# EAGLE board saturn_frontend_rv3 (EAGLE 7.7.0)
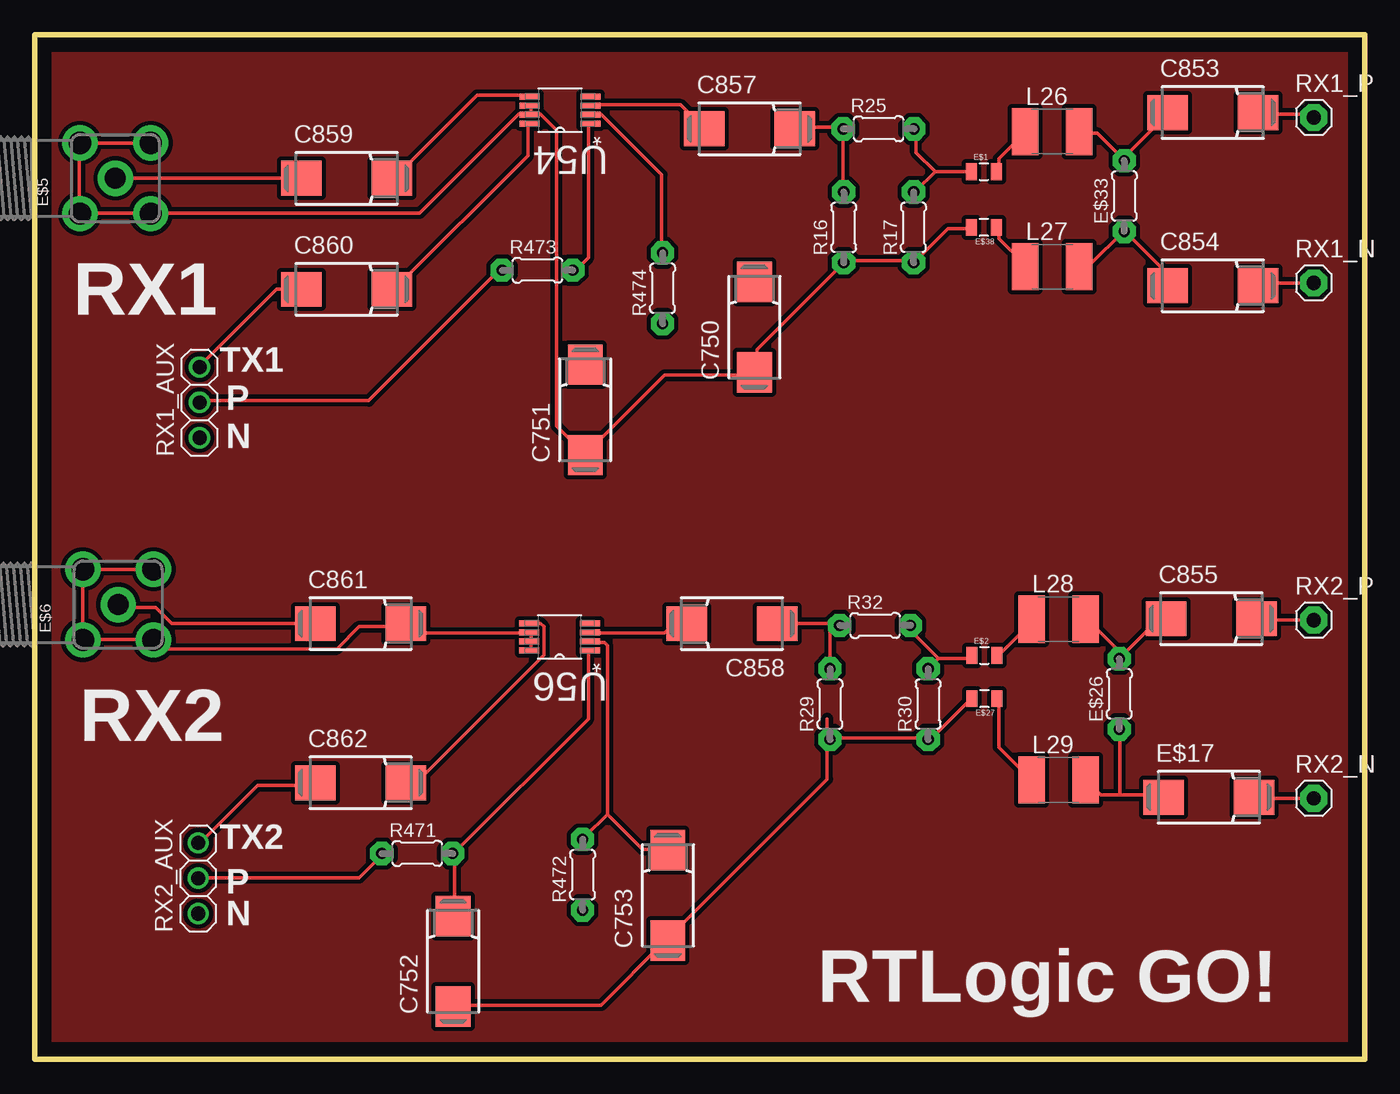
[diagram p0: board, top side]
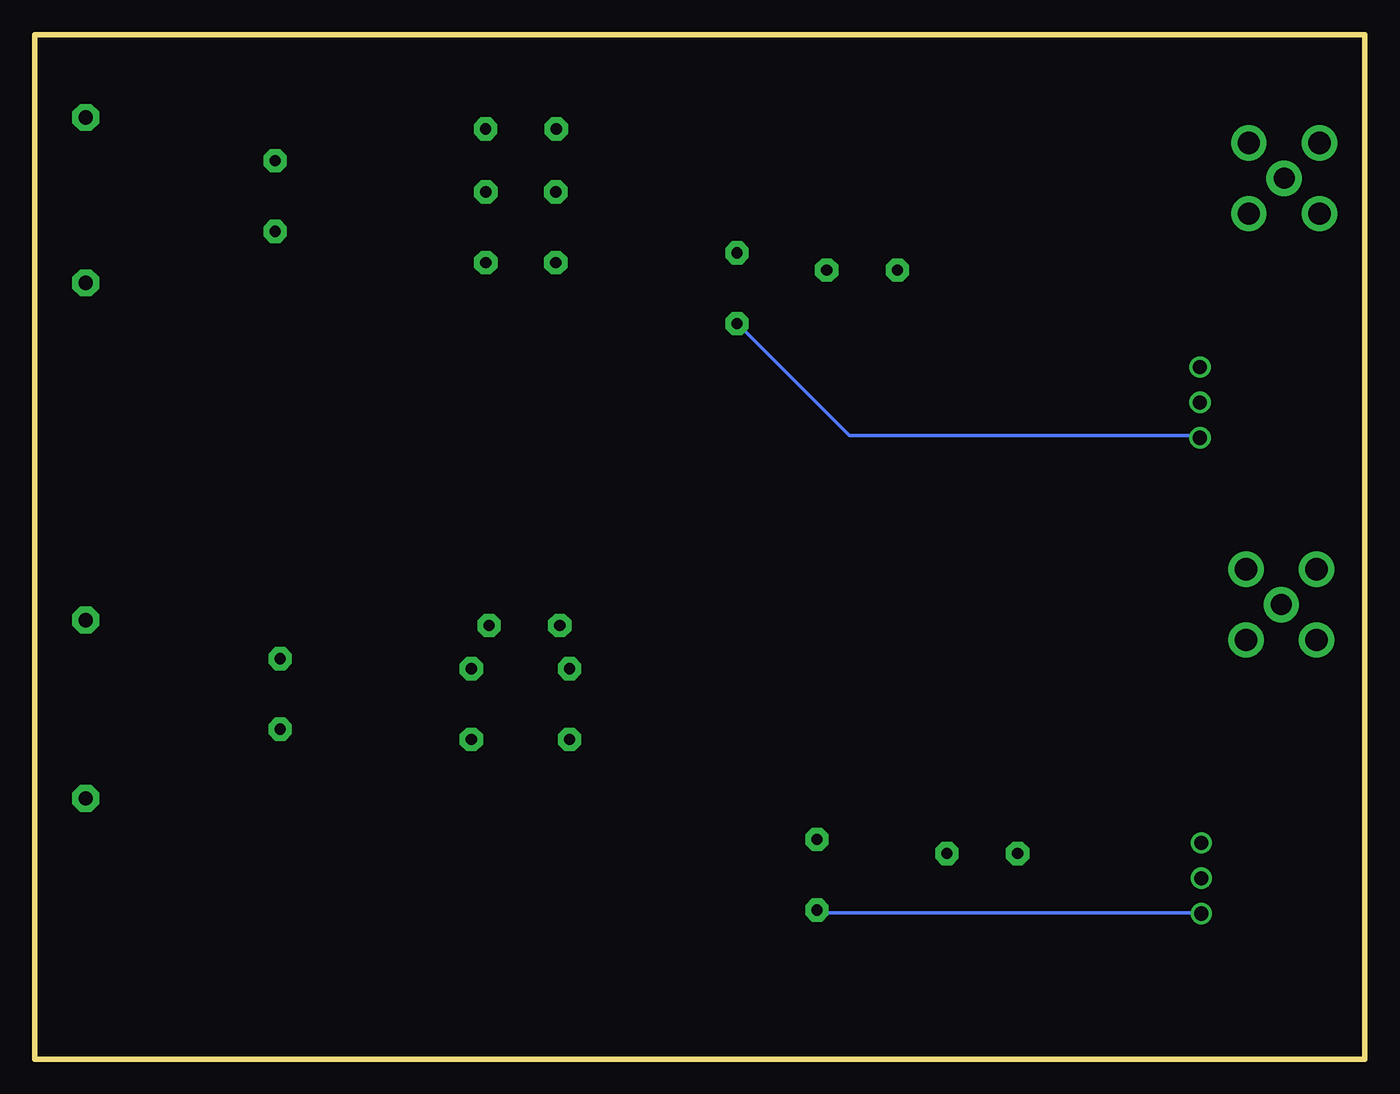
[diagram p1: board, bottom side, seen from below]

Size 95.55 x 73.61 mm. Coordinates in mm from the lower left corner, seen from the top.
Outline: 0,73.61 95.55,73.61 95.55,0 0,0 0,73.61
Copper layers (1*16): Top 0.035mm / dielectric 1.5mm / Bottom 0.035mm
Design rules "default": minimum track width 10mil, minimum drill 24mil, track to track 8mil, track to pad 8mil, pad to pad 8mil, via to via 8mil, smd to smd 8mil, copper to edge 40mil, drill to drill 8mil, minimum pad ring 10mil, minimum via ring 8mil, stop-mask expansion 4mil, vias tented up to drill 0mil, thermal gap 10mil

## Footprints (pad centres in the part's own frame; a part is rotated, then mirrored left to right if it is on the bottom)
085CS_1AR = smd 2.9 x 2.5: + 3.25,0; - -3.25,0
0805 = smd 0.8 x 1.2: 1 -0.9,0; 2 0.9,0
SMA90_DIP = drill 1.5 pad 2.54: ANTENNA 0,0 | drill 1.6 pad 2.54: GND1 -2.54,2.54; GND2 2.54,2.54; GND3 -2.54,-2.54; GND4 2.54,-2.54
0204/5 = drill 0.813 pad 1.676 octagon: 1 -2.54,0; 2 2.54,0
L1812 = smd 1.9 x 3.4: 1 -1.95,0; 2 1.95,0
1X03 = drill 1.016: 1 -2.54,0; 2 0,0; 3 2.54,0
1X01 = drill 1.016 pad 1.93 octagon: 1 0,0
SOP65P490X110-8N = smd 1.422 x 0.432: 1 -2.184,0.965; 2 -2.184,0.33; 3 -2.184,-0.33; 4 -2.184,-0.965; 5 2.184,-0.965; 6 2.184,-0.33; 7 2.184,0.33; 8 2.184,0.965

## Placement (x,y rotation side)
C750  100 pF  [085CS_1AR]  51.71,52.6 90 top
C751  100 pF  [085CS_1AR]  39.55,46.66 90 top
C752  100 pF  [085CS_1AR]  30.05,7.04 90 top
C753  100 pF  [085CS_1AR]  45.49,11.77 90 top
C853  100 pF  [085CS_1AR]  84.63,68.02 0 top
C854  100 pF  [085CS_1AR]  84.63,55.58 0 top
C855  100 pF  [085CS_1AR]  84.53,31.65 0 top
C857  100 pF  [085CS_1AR]  51.36,66.85 0 top
C858  100 pF  [085CS_1AR]  50.09,31.29 180 top
C859  100 pF  [085CS_1AR]  22.4,63.3 0 top
C860  100 pF  [085CS_1AR]  22.4,55.32 0 top
C861  100 pF  [085CS_1AR]  23.42,31.29 0 top
C862  100 pF  [085CS_1AR]  23.42,19.86 0 top
E$1  [0805]  68.19,63.78 0 top
E$2  [0805]  68.22,29.01 0 top
E$5  [SMA90_DIP]  5.79,63.3 90 top
E$6  [SMA90_DIP]  5.99,32.66 90 top
E$17  100 pF  [085CS_1AR]  84.36,18.82 0 top
E$26  93.7 Ohm  [0204/5]  77.92,26.24 90 top
E$27  [0805]  68.22,25.91 180 top
E$33  93.7 Ohm  [0204/5]  78.28,62.03 90 top
E$38  [0805]  68.19,59.77 180 top
L26  1.0 nH  [L1812]  73.1,66.65 0 top
L27  1.0 nH  [L1812]  73.1,56.95 0 top
L28  1.0 nH  [L1812]  73.56,31.62 0 top
L29  1.0 nH  [L1812]  73.56,20.07 0 top
R16  221 Ohm  [0204/5]  58.12,59.77 90 top
R17  221 Ohm  [0204/5]  63.14,59.77 90 top
R25  23.7 Ohm  [0204/5]  60.63,66.85 0 top
R29  221 Ohm  [0204/5]  57.14,25.51 90 top
R30  221 Ohm  [0204/5]  64.19,25.51 90 top
R32  23.7 Ohm  [0204/5]  60.38,31.17 0 top
R471  100 Ohm  [0204/5]  27.48,14.78 0 top
R472  100 Ohm  [0204/5]  39.36,13.26 90 top
R473  100 Ohm  [0204/5]  36.12,56.69 0 top
R474  100 Ohm  [0204/5]  45.1,55.39 90 top
RX1_AUX  [1X03]  11.84,47.19 90 top
RX1_N  [1X01]  91.9,55.78 0 top
RX1_P  [1X01]  91.9,67.67 0 top
RX2_AUX  [1X03]  11.73,13 90 top
RX2_N  [1X01]  91.9,18.75 0 top
RX2_P  [1X01]  91.9,31.55 0 top
U54  [SOP65P490X110-8N]  37.74,68.19 180 top
U56  [SOP65P490X110-8N]  37.71,30.34 180 top

## Library data of the parts
C750-C753 C853-C855 C857-C862 E$5 E$6 E$17 E$26 E$33 R16 R17 R25 R29 R30 R32 R471-R474 RX1_AUX RX1_N RX1_P RX2_AUX RX2_N RX2_P = adafruit
E$1 E$2 E$27 E$38 = 0805
L26-L29 = eagle-ltspice
U54 U56 = SOP65P490X110-8N

## Nets
J11: C750.- C751.- E$5.GND1 E$5.GND2 E$5.GND3 E$5.GND4 E$38.2 R16.1 R17.1 U54.6 U54.7
J12: C752.- C753.- E$27.2 R29.1 R30.1
S$1: C853.+ RX1_P.1
S$2: C751.+
S$3: C750.+
S$5: C859.- E$5.ANTENNA
S$6: C854.- E$33.1 L27.2
S$7: C860.- RX1_AUX.3
S$8: R473.1 RX1_AUX.2
S$10: E$2.1 R30.2 R32.2
S$11: C854.+ RX1_N.1
S$12: C853.- E$33.2 L26.2
S$14: E$2.2 L28.1
S$16: C859.+ U54.5
S$17: C855.+ RX2_P.1
S$18: C860.+ U54.8
S$19: C858.+
S$21: E$17.+ RX2_N.1
S$22: R473.2 U54.1
S$23: R474.2 U54.2
S$24: C861.+ E$6.GND1 E$6.GND2 E$6.GND3 E$6.GND4 U56.6 U56.7 U56.8
S$25: R474.1 RX1_AUX.1
S$26: C857.+ R16.2 R25.1
S$27: E$1.1 R17.2 R25.2
S$28: E$1.2 L26.1
S$29: E$38.1 L27.1
S$32: C862.- RX2_AUX.3
S$33: R471.1 RX2_AUX.2
S$34: R472.1 RX2_AUX.1
S$35: C862.+ U56.5
S$36: C861.- E$6.ANTENNA
S$37: C857.- U54.3
S$39: U56.3
S$40: C752.+ R471.2 U56.1
S$41: C753.+ R472.2 U56.2
S$42: C858.- R29.2 R32.1
S$43: E$27.1 L29.1
S$44: C855.- E$26.2 L28.2
S$45: E$17.- E$26.1 L29.2

## Tracks (layer width: path | path; a pad name or v marks a point on that pad's centre or on a via)
GND
  pour Top (isolate 0.305): 0,73.61 0,0 95.55,0 95.55,0.46 95.55,73.61
J11
  Top 0.254: E$38.2 67.21,59.66 65.61,59.66 63.32,57.38 R17.1 63.09,57.38 58.29,57.38 R16.1 58.06,57.15 51.89,50.98 51.89,49.38 C750.- 51.66,49.15 45.26,49.15 39.55,43.43 | E$5.GND4 E$5.GND2 3.2,65.84 3.2,60.81 E$5.GND1 3.43,60.81 8.23,60.81 E$5.GND3 8.46,60.81 27.66,60.81 34.75,67.89 35.43,67.89 U54.7 35.66,67.89 | 35.66,67.89 35.66,68.35 U54.6 | 35.66,67.89 36.35,67.89 37.49,66.75 37.49,45.49 39.55,43.43 | 39.55,43.43 C751.-
J12
  Top 0.254: E$27.2 67.21,25.83 64.24,22.86 R30.1 64.01,23.09 57.15,23.09 R29.1 | C752.- 30.17,3.89 40.69,3.89 45.26,8.46 C753.- 45.49,8.69 56.92,20.12 56.92,22.86 R29.1 | 56.92,24.46 56.92,23.09 R29.1
S$1
  Top 0.254: RX1_P.1 91.67,67.89 88.01,67.89 C853.+
S$2
  Top 0.254: 38.66,50.8 C751.+
S$3
  Top 0.254: 51.36,56.2 C750.+
S$5
  Top 0.254: C859.- 18.97,63.32 5.94,63.32 E$5.ANTENNA
S$6
  Top 0.254: C854.- 81.38,55.78 81.38,56.46 78.41,59.44 E$33.1 78.18,59.44 75.89,57.15 75.21,57.15 L27.2
S$7
  Top 0.254: C860.- 17.37,55.32 11.89,49.83 RX1_AUX.3
S$8
  Top 0.254: RX1_AUX.2 11.89,47.32 24,47.32 33.38,56.69 R473.1
S$10
  Top 0.254: 64.92,28.8 67.21,28.8 E$2.1 | 64.92,28.8 64.24,28.12 R30.2 | 64.92,28.8 63.09,30.63 63.09,31.09 R32.2
S$11
  Top 0.254: RX1_N.1 88.01,55.78 C854.+
S$12
  Top 0.254: 78.18,64.69 81.38,67.89 C853.- | 78.18,64.69 76.35,66.52 75.21,66.52 L26.2 | 78.18,64.69 E$33.2
S$14
  Top 0.254: E$2.2 69.27,29.03 71.78,31.55 L28.1
S$16
  Top 0.254: U54.5 35.43,69.27 31.78,69.27 25.83,63.32 C859.+
S$17
  Top 0.254: RX2_P.1 87.78,31.55 C855.+
S$18
  Top 0.254: U54.8 35.43,67.21 35.43,64.92 25.83,55.32 C860.+
S$19
  Top 0.254: 46.63,31.32 C858.+
S$21
  Top 0.254: RX2_N.1 87.78,18.74 E$17.+
S$22
  Top 0.254: U54.1 39.78,67.21 39.78,57.61 38.86,56.69 R473.2
S$23
  Top 0.254: U54.2 40,67.89 40.69,67.89 45.03,63.55 45.03,58.06 R474.2
S$24
  Top 0.254: 26.75,31.32 C861.+ | C861.+ 26.52,31.09 23.32,31.09 21.72,29.49 9.14,29.49 8.69,29.95 E$6.GND3 8.46,30.17 3.66,30.17 E$6.GND1 3.43,30.17 3.43,35.2 E$6.GND2 E$6.GND4 | U56.8 35.66,29.49 35.66,29.95 U56.7 35.66,30.17 35.66,30.63 U56.6 35.43,30.63 27.2,30.63 26.75,31.09 C861.+
S$25
  Bottom 0.254: RX1_AUX.1 11.89,44.81 37.03,44.81 45.03,52.81 R474.1
S$26
  Top 0.254: C857.+ 54.64,66.98 58.06,66.98 R25.1 58.06,66.75 58.06,62.41 R16.2
S$27
  Top 0.254: 64.69,63.78 E$1.1 | 64.69,63.78 63.32,62.41 R17.2 | 64.69,63.78 63.32,65.15 63.32,66.75 R25.2
S$28
  Top 0.254: E$1.2 69.27,63.78 69.27,64.69 71.09,66.52 L26.1
S$29
  Top 0.254: E$38.1 69.27,59.66 69.27,58.98 71.09,57.15 L27.1
S$32
  Top 0.254: 19.91,19.61 C862.- 19.89,19.66 16,19.66 11.89,15.54 RX2_AUX.3
S$33
  Top 0.254: RX2_AUX.2 11.89,13.03 23.32,13.03 24.92,14.63 R471.1
S$34
  Bottom 0.254: RX2_AUX.1 11.89,10.52 39.32,10.52 R472.1
S$35
  Top 0.254: U56.5 35.66,31.32 36.35,31.32 36.58,31.09 36.58,29.03 27.43,19.89 26.75,19.89 C862.+
S$36
  Top 0.254: C861.- 20.12,31.32 9.83,31.32 8.69,32.46 6.17,32.46 E$6.ANTENNA
S$37
  Top 0.254: 47.81,67.15 C857.- 47.78,67.21 46.41,68.58 40,68.58 U54.3
S$39
  Top 0.254: 45.95,31.32 45.26,30.63 40,30.63 U56.3
S$40
  Top 0.254: U56.1 39.78,29.26 39.78,24.46 30.17,14.86 R471.2 30.17,14.63 30.17,10.29 C752.+
S$41
  Top 0.254: 41.15,17.6 41.15,29.72 40.92,29.95 40,29.95 U56.2 | 41.15,17.6 39.55,16 R472.2 | 41.15,17.6 43.66,15.09 45.26,15.09 C753.+
S$42
  Top 0.254: 57.15,31.32 57.84,31.32 R32.1 57.15,31.32 | 57.15,31.32 53.49,31.32 C858.- | 57.15,31.32 57.15,28.12 R29.2
S$43
  Top 0.254: E$27.1 69.27,25.83 69.27,22.4 71.55,20.12 L29.1
S$44
  Top 0.254: 78.18,29.03 77.95,28.8 E$26.2 78.18,29.03 | 78.18,29.03 80.7,31.55 81.15,31.55 C855.- | 78.18,29.03 75.67,31.55 L28.2
S$45
  Top 0.254: 77.95,18.97 76.58,18.97 75.67,19.89 L29.2 | 77.95,18.97 80.92,18.97 E$17.- | 77.95,18.97 77.95,23.55 E$26.1

## Text on the board
tPlace: RX1 | TX1 | P | N | RX2 | TX2 | P | N | RTLogic GO!